# Altium PCB AFC1.PcbDoc
Units mm, origin at the board's own origin, x right, y up, seen from the top; angles counter-clockwise.
Board outline 43 x 16.25 mm, 2 copper layers (Top Layer, Bottom Layer); 13 components, 13 nets, 66 pads, 5 vias.
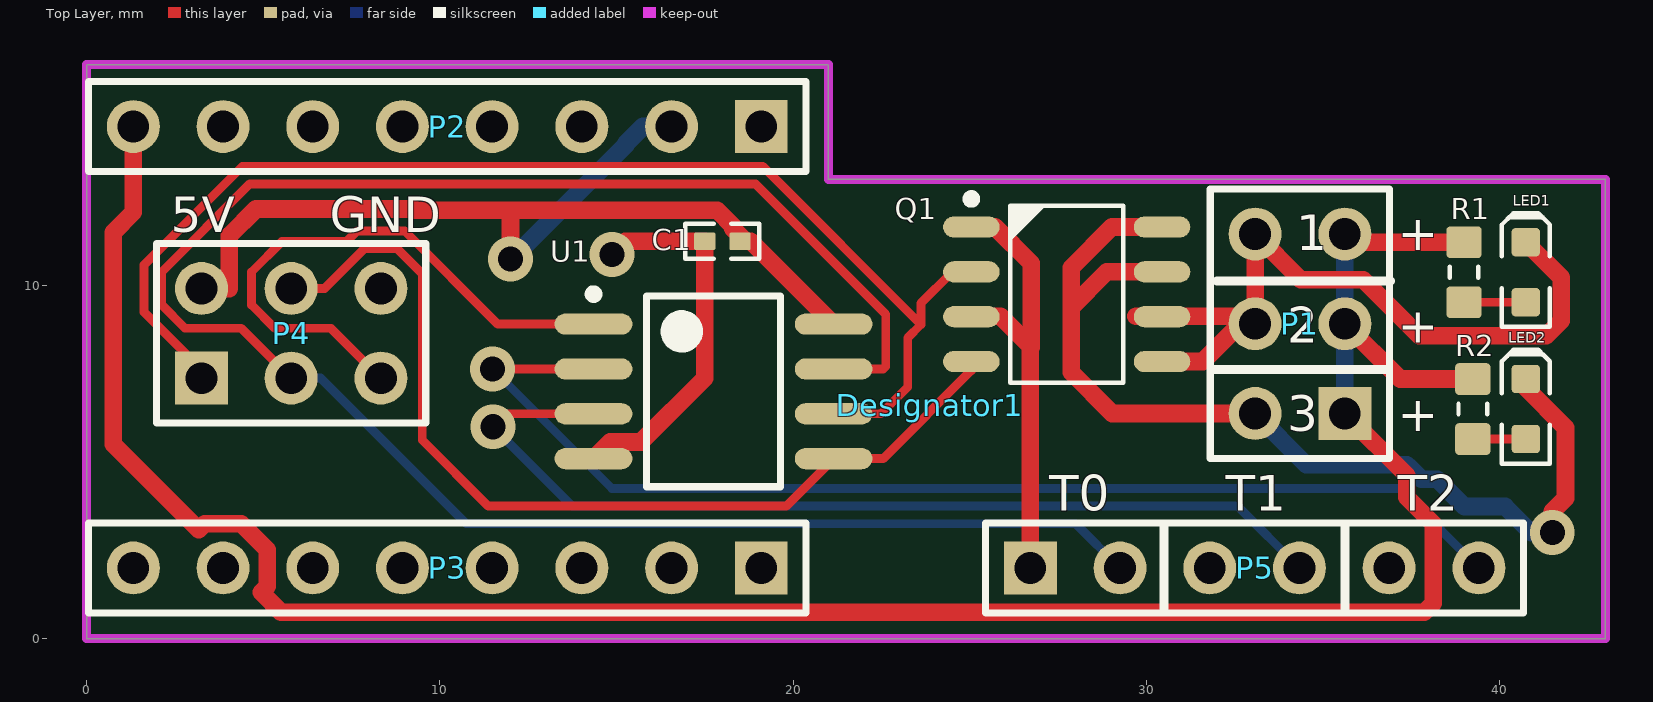
[diagram p0: Top Layer view]
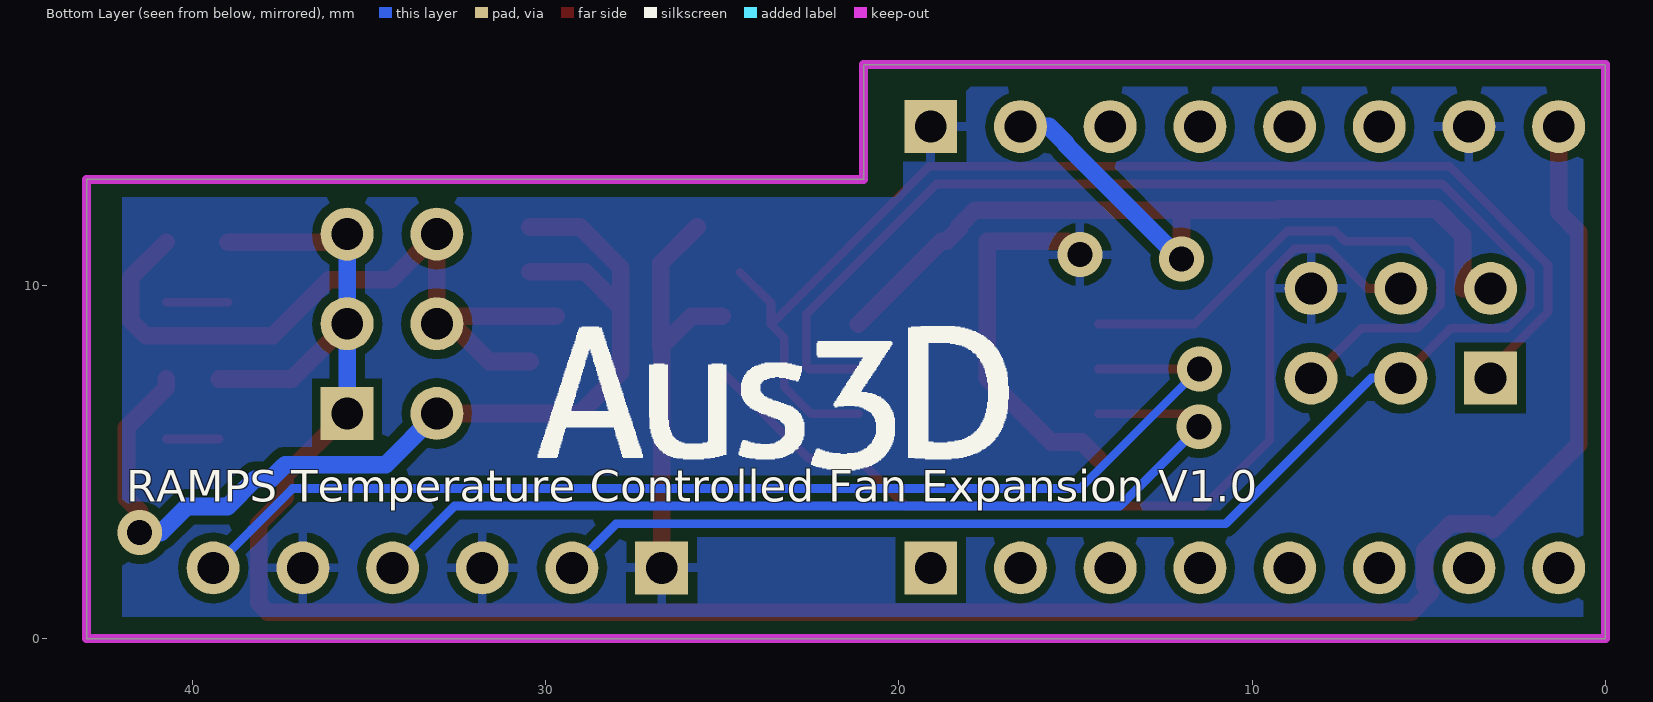
[diagram p1: Bottom Layer view, seen from below]
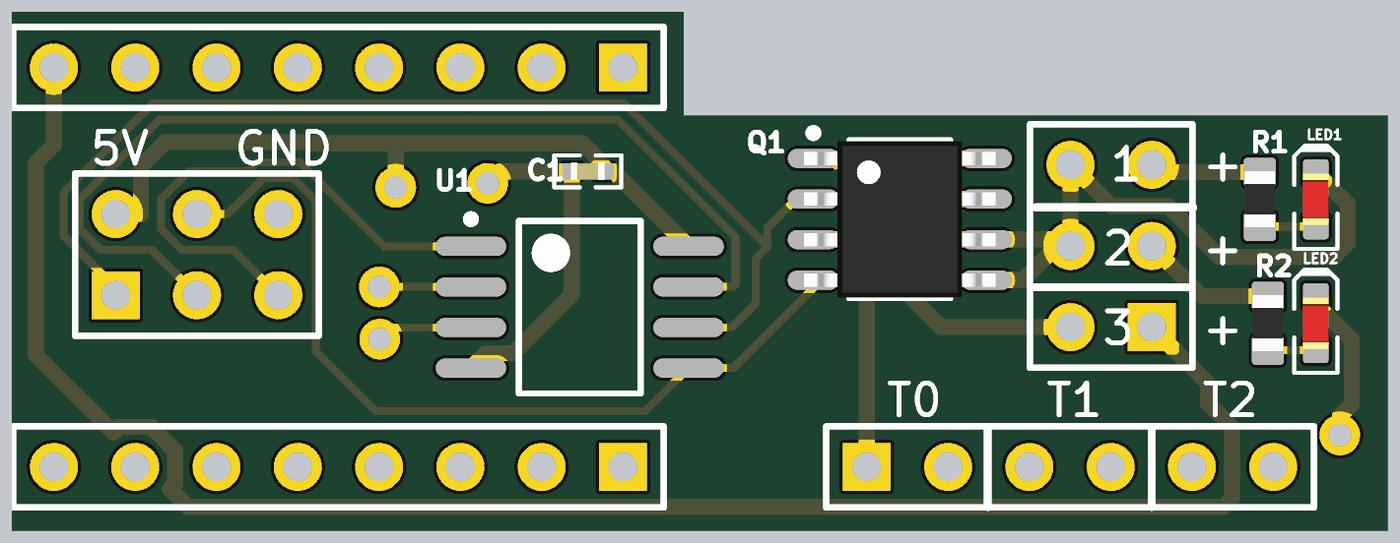
[diagram p2: 3D render of the assembled board from above, using the file's embedded part models]

## Layer stack, top to bottom
Top Solder: solder mask 0.0102, Solder Resist, Dk 3.5
Top Layer: signal copper 0.0356
Dielectric1: dielectric 0.32, FR-4, Dk 4.8
Bottom Layer: signal copper 0.0356
Bottom Solder: solder mask 0.0102, Solder Resist, Dk 3.5

## Board outline
0,0 43,0 43,13 21,13 21,16.25 0,16.25

## Design rules (kind name [scope] priority, off if disabled: settings)
Clearance [All] p1: gap=0.25
FabricationTestPointUsage TestPointUsage [All] p1: valid=0 allowmultiple=FALSE
FabricationTestpoint Testpoint [All] p1: side=3 testpointundercomponent=TRUE minsize=1.016 maxsize=2.54 preferedsize=1.524 minholesize=0 maxholesize=1.016 preferedholesize=0.813 testpointgrid=0.025 allowsidetop=TRUE allowsidebottom=TRUE usegrid=TRUE gridtolerance=0
PolygonConnect [All] p1: connectstyle=Relief reliefconductorwidth=0.254 reliefentries=4 polygonreliefangle="90 Angle" airgapwidth=0.254
RoutingVias [All] p1: holewidth=0.6 width=1 viastyle="Through Hole" minholewidth=0.6 minwidth=1 maxholewidth=0.6 maxwidth=1
SilkToSolderMaskClearance SilkscreenOverComponentPads [IsPad] p1: minsilkscreentomaskgap=0.254 clearancetoexposedcopper=TRUE
SolderMaskExpansion [All] p1: expansion=0.102
Width Width_Power [(InNet('5V') OR InNet('12V') OR InNet('FAN1&2') OR InNet('FAN3') OR InNet('GND'))] p1: maxlimit=0.5 minlimit=0.5 preferedwidth=0.5 minimp=50.000000 maximp=50.000000 favimp=50.000000
Width [All] p2: maxlimit=0.25 minlimit=0.25 preferedwidth=0.25 minimp=50.000000 maximp=50.000000 favimp=50.000000
27 further rules are at their usual default settings.

## Classes and differential pairs
component class AFC1: C1 LED1 LED2 P1 P2 P3 P4 P5 Q1 R1 R2 U1

## Components (designator, comment, footprint, x,y, rotation, side; value= is the part's Value field where it differs from the comment)
C1 "100n" CAPC1005X55N 18,11.25 r0 top
Designator1 "Comment" AUS3D-LOGO-BACK 23.875,6.625 r0 top
LED1 "Red" LED-0603-RED 40.75,10.375 r90 top
LED2 "Red" LED-0603-RED 40.75,6.5 r90 top
P1 "Fan Pins" HDR2X3 35.625,6.375 r90 top
P2 "Header 8" HDR1X8 19.1,14.5 r180 top
P3 "Header 8" HDR1X8 19.1,2 r180 top
P4 "ICSP" HDR2X3 3.25,7.375 r0 top
P5 "Thermistor Pins" HDR1X6 26.72,2 r0 top
Q1 "MOSFET_AO4818B" SOIC127P600X175-8AN 27.75,9.75 r0 top
R1 "Thick Film" RESC1608X55N 39,10.375 r270 top
R2 "Thick Film" RESC1608X55N 39.25,6.5 r270 top
U1 "ATtiny45-20SU" 8S2_N 17.75,7 r0 top

## Footprints (in the part's own frame and the unit in brackets; to place one, negate y for a bottom-side part, rotate by r counter-clockwise, add the part's x,y. Pads: shape width x height; smd on the part's side, far side on the other; paste and mask are expansions set on the pad)
8S2_N [mm] "SOP, 8-Leads, Body 5.3x5.3mm, Pitch 1.27mm, IPC Medium Density"
  oval 2.2x0.6 smd: 1(-3.4,1.905) 2(-3.4,0.635) 3(-3.4,-0.635) 4(-3.4,-1.905) 5(3.4,-1.905) 6(3.4,-0.635) 7(3.4,0.635) 8(3.4,1.905)
  silkscreen extent -3.52,-2.7 1.9,2.88, body extent -2.7,-2.68 2.7,2.68, height 2.16
AUS3D-LOGO-BACK [mm]
CAPC1005X55N [mm] "Chip Capacitor, Body 1.0x0.5mm, EIA 0402, IPC Medium Density"
  round 0.2 on Mech15: 0(0,0)
  rrect20% 0.6x0.5 smd: 1(-0.5,0) 2(0.5,0)
  Top Layer pour cut-out: -0.325,0.375 -0.2,0.5 0.2,0.5 0.325,0.375 0.325,-0.375 0.2,-0.5 -0.2,-0.5 -0.325,-0.375
  silkscreen extent -1.05,-0.5 1.05,0.5, body extent -0.52,-0.27 0.53,0.28, height 0.55
HDR1X6 [mm] "Connector; Header; 6 Position"
  rect 1.5x1.5 hole 0.9: 1(0,0)
  round 1.5 hole 0.9: 2(2.54,0) 3(5.08,0) 4(7.62,0) 5(10.16,0) 6(12.7,0)
  silkscreen extent -1.27,-1.27 13.97,1.27
HDR1X8 [mm] "Connector; Header; 8 Position"
  rect 1.5x1.5 hole 0.9: 1(0,0)
  round 1.5 hole 0.9: 2(2.54,0) 3(5.08,0) 4(7.62,0) 5(10.16,0) 6(12.7,0) 7(15.24,0) 8(17.78,0)
  silkscreen extent -1.27,-1.27 19.05,1.27
HDR2X3 [mm] "Connector; Header; 3x2 Position"
  rect 1.5x1.5 hole 0.9: 1(0,0)
  round 1.5 hole 0.9: 2(0,2.54) 3(2.54,0) 4(2.54,2.54) 5(5.08,0) 6(5.08,2.54)
  silkscreen extent -1.27,-1.27 6.35,3.81
LED-0603-RED [mm]
  round 0.254 on Mech15: 0(0,0)
  rrect25% 0.8x0.8 smd: A(-0.85,0) K(0.85,0)
  Top Layer pour cut-out: -0.5,0.5 0.5,0.5 0.5,-0.5 -0.5,-0.5
  silkscreen extent -1.55,-0.67 1.68,0.67, body extent -0.8,-0.4 0.8,0.4, height 0.75
RESC1608X55N [mm] "Chip Resistor, Body 1.6x0.8mm, EIA 0603, IPC Medium Density"
  round 0.254 on Mech15: 0(0,0)
  rrect25% 0.9x1 smd: 1(-0.85,0) 2(0.85,0)
  Top Layer pour cut-out: -0.6,0.5 -0.4,0.7 0.4,0.7 0.6,0.5 0.6,-0.5 0.4,-0.7 -0.4,-0.7 -0.6,-0.5
  silkscreen extent -0.15,-0.41 0.15,0.41, body extent -0.87,-0.47 0.88,0.48, height 0.54
SOIC127P600X175-8AN [mm] "SOIC, 8-Leads, Body 4.9x3.9mm, Pitch 1.27mm, IPC Medium Density"
  round 1 on Mech15: 0(0,0)
  oval 1.6x0.6 smd: 1(-2.7,1.905) 2(-2.7,0.635) 3(-2.7,-0.635) 4(-2.7,-1.905) 5(2.7,-1.905) 6(2.7,-0.635) 7(2.7,0.635) 8(2.7,1.905)
  silkscreen extent -2.82,-2.5 1.6,2.82, body extent -3,-2.45 3,2.45, height 1.75

## Part data
C1: library part CAPC_100n_0402_X5R_16V_10%, "Capacitor SMD Cer 100nF 10% 16V X5R 0402"
LED1 LED2: library part LED_SMD_Red_0603_220mcd, "LED 0603 SMD Hyper Red 630nm 220mcd 20mA"
P1 P4: library part "Header 3X2", "Header, 3-Pin, Dual row"
P2 P3: "Header, 8-Pin"
P5: library part "Header 6", "Header, 6-Pin"
Q1: "MOSFET Dual-Channel 30V 8.5A SOIC-8 SMD"
R1 R2: library part RES_330R_0603_5%, "Resistor SMD chip 330 Ohm 0.1W 5% 0603"
U1: "8-bit AVR Microcontroller, 20MHz, 2.7-5.5V, 4K Flash, 256 Bytes EEPROM, 256 Bytes SRAM, Industrial Grade (-40°C to 85°C), 8-Lead SOIC, Pb-Free"

## Via types
v1: diameter 1.27, hole 0.711, Top Layer to Bottom Layer, 5 vias

## Nets (pads, with @x,y where several pads share a name; then routed paths per layer and width w, separated by ;. In a path a pad name is that pad's centre, name@x,y a point inside that pad or via, vN(x,y) a via of type N, cw(c..) or ccw(c..) an arc to the next point about the centre after c; other vN are vias at no path point)
5V: C1.2 P2.2 P4.2 U1.8 | length 28.6
  Top Layer w0.5: P4.2 4.04,9.915 4.04,11.412 4.793,12.165 9.262,12.165 9.302,12.125 12,12.125 ; v1(12,10.75) 12,12.125 ; U1.8 18.805,11.25 18.653,11.25 18.3,11.603 18.3,11.678 17.853,12.125 12,12.125
  Bottom Layer w0.5: v1(12,10.75) 12.038,10.75 15.27,13.982 15.27,14.02 15.75,14.5 P2.2
12V: P1.1 P1.3 P1.5 P2.8 R1.1 R2.1 | length 70.1
  Top Layer w0.5: P2.8 1.32,12.07 0.75,11.5 0.75,5.5 3.171,3.079 3.342,3.25 4.378,3.25 5.11,2.518 5.11,1.482 4.939,1.311 5.5,0.75 37.875,0.75 38.13,1.005 38.13,3.25 37.375,4.005 37.375,4.625 P1.1 36.375,5.625 ; P1.3 37.19,7.35 R2.1 ; P1.5 35.855,11.225 R1.1
  Bottom Layer w0.5: P1.1 P1.3 P1.5
FAN1&2: LED1.K P1.4 P1.6 Q1.5 Q1.6 | length 20.8
  Top Layer w0.5: Q1.6@29.71,9.125 P1.4@32.625,9.125 ; Q1.5 31.605,7.845 P1.4@32.625,8.865 ; P1.4@33.035,8.865 P1.4 P1.6 34.375,10.165 36.143,10.165 37.733,8.575 41.325,8.575 41.75,9 41.75,10.225 LED1.K
"FAN1+2 PWM": P4.4 Q1.4 U1.5 | length 27.1
  Top Layer w0.25: P4.4 6.739,9.915 7.864,11.04 8.796,11.04 9.5,10.336 9.5,5.625 11.375,3.75 19.805,3.75 U1.5 22.55,5.095 Q1.4@25.05,7.595
FAN3: LED2.K P1.2 Q1.7 Q1.8 | length 29.7
  Top Layer w0.5: 27.875,9.375 28.885,10.385 Q1.7 ; Q1.8 29.03,11.655 27.875,10.5 27.875,7.539 29.039,6.375 P1.2 ; LED2.K 40.75,7.099 41.875,5.974 41.875,3.975 41.5,3.6 v1(41.5,3)
  Bottom Layer w0.5: P1.2 34.533,4.927 37.377,4.927 37.429,4.875 37.795,4.509 38.241,4.509 39.012,3.738 40.17,3.738 40.909,3 41.341,3 41.5,2.841 v1(41.5,3)
FAN3_PWM: P4.1 Q1.2 U1.6 | length 35
  Top Layer w0.25: P4.1@3.371,7.496 1.625,9.242 1.625,10.588 4.412,13.375 19.142,13.375 23.622,8.895 23.622,9.497 Q1.2@24.5,10.375 ; U1.6 22.49,6.365 23.25,7.125 23.25,8.52 23.625,8.895
GND: C1.1 P2.1 P2.7 P4.6 P5.1 P5.3 P5.5 Q1.1 Q1.3 U1.4 | length 23
  Top Layer w0.5: U1.4 14.82,5.565 15.691,5.565 17.5,7.374 C1.1 15.25,11.25 v1(14.875,10.875) ; Q1.3@25,9.125 25.875,9.125 26.75,8.25 ; Q1.1@25.72,11.655 26.75,10.625 26.75,8.25 ; P5.1 26.72,8.22 26.75,8.25
NetLED1_A: LED1.A R1.2 | length 1.7
  Top Layer w0.25: R1.2 LED1.A
NetLED2_A: LED2.A R2.2 | length 1.5
  Top Layer w0.25: R2.2 LED2.A
RESET: P4.5 U1.1 | length 16.7
  Top Layer w0.25: P4.5 6.915,8.79 5.324,8.79 4.665,9.449 4.665,10.381 5.534,11.25 7.367,11.25 7.657,11.54 9.003,11.54 11.638,8.905 U1.1
SCK: P4.3 P5.2 U1.7 | length 57.6
  Top Layer w0.25: P4.3@6.05,7.635 P4.3 4.375,8.79 2.784,8.79 2.125,9.449 2.125,10.381 4.619,12.875 18.935,12.875 22.625,9.185 22.625,7.709 22.551,7.635 U1.7
  Bottom Layer w0.25: P4.3 6.625,7.375 10.75,3.25 28.01,3.25 P5.2
THERM1: P5.4 U1.3 | length 27.5
  Top Layer w0.25: v1(11.5,6) 11.865,6.365 U1.3
  Bottom Layer w0.25: v1(11.5,6) 13.75,3.75 32.59,3.75 P5.4
THERM2: P5.6 U1.2 | length 33.1
  Top Layer w0.25: v1(11.49,7.635) U1.2
  Bottom Layer w0.25: v1(11.49,7.635) 14.875,4.25 37.17,4.25 38.335,3.085 P5.6
pads on no net: C1.0 LED1.0 LED2.0 P2.3 P2.4 P2.5 P2.6 P3.1 P3.2 P3.3 P3.4 P3.5 P3.6 P3.7 P3.8 Q1.0 R1.0 R2.0

## Polygon pours and split planes (outlines as drawn)
GND on Bottom Layer "GND - BottomLayer" (solid, pour order 0): 0.5,15.625 0.625,15.5 0.625,0.625 42,0.625 42,12.5 20.125,12.5 20,12.625 19.875,12.75 19.875,15.625

## Keep-outs
Keep-Out Layer:
  the board outline again, w0.254

## Silkscreen, mask and mechanical layers (free items; w line width, h text height)
Top Overlay:
  lines w0.254: 30.5,0.75 30.5,3.25 ; 31.875,7.625 36.79,7.625 ; 32,10.125 36.915,10.125 ; 35.625,0.75 35.625,3.25
  text "5V" at 2.375,11.5 h1
  text "GND" at 6.875,11.5 h1
  text "1" at 34.25,11 h1
  text "+" at 37.125,11 h1
  text "2" at 34,8.375 h1
  text "+" at 37.125,8.375 h1
  text "3" at 34,5.875 h1
  text "+" at 37.125,5.875 h1
  text "T0" at 27.25,3.625 h1
  text "T1" at 32.25,3.625 h1
  text "T2" at 37.125,3.625 h1
Bottom Overlay:
  text "RAMPS Temperature Controlled Fan Expansion V1.0" at 41.875,3.875 h0.9
Mechanical 16:
  drawing of 1874 lines, arcs and shapes, not listed
  text "1" at -88.754,99.611 h0.6
  text "2" at -16.11,99.611 h0.6
  text "3" at 57.042,99.611 h0.6
  text "4" at 129.94,99.611 h0.6
  text "A" at -123.095,76.599 h0.6
  text "A" at 163.925,76.599 h0.6
  text "B" at -123.095,28.542 h0.6
  text "B" at 163.925,28.542 h0.6
  text "C" at -123.095,-19.972 h0.6
  text "C" at 163.925,-19.972 h0.6
  text "ENGINEER:" at 48.99,-56.98 h0.6
  text "TITLE:" at 87.09,-56.98 h0.6
  text "PCB DESIGNER:" at 48.99,-64.473 h0.6
  text "D" at -123.095,-67.978 h0.6
  text "D" at 163.925,-67.978 h0.6
  text "DATE:" at 48.99,-72.22 h0.6
  text "PART NO.:" at 87.09,-72.22 h0.6
  text "REV:" at 140.43,-72.22 h0.6
  text "Altium Limited" at 15.97,-74.76 h0.6
  text ".PRINT_DATE" at 50.26,-75.268 h0.6
  text "12a Rodborough Rd" at 15.97,-77.3 h0.6
  text "Frenchs Forest" at 15.97,-79.84 h0.6
  text "FILE NAME:" at 48.99,-79.84 h0.6
  text "DWG NO:" at 87.09,-79.84 h0.6
  text "SCALE:" at 140.43,-79.84 h0.6
  text "NSW 2086" at 15.97,-82.38 h0.6
  text ".PCB_FILE_NAME_NO_PATH" at 50.26,-82.888 h0.6
  text "1" at -88.754,-88.349 h0.6
  text "2" at -16.11,-88.349 h0.6
  text "3" at 57.042,-88.349 h0.6
  text "4" at 129.94,-88.349 h0.6